# Allegro board PROIECT1_PACT_DIMA_DARIA_ELENA.brd
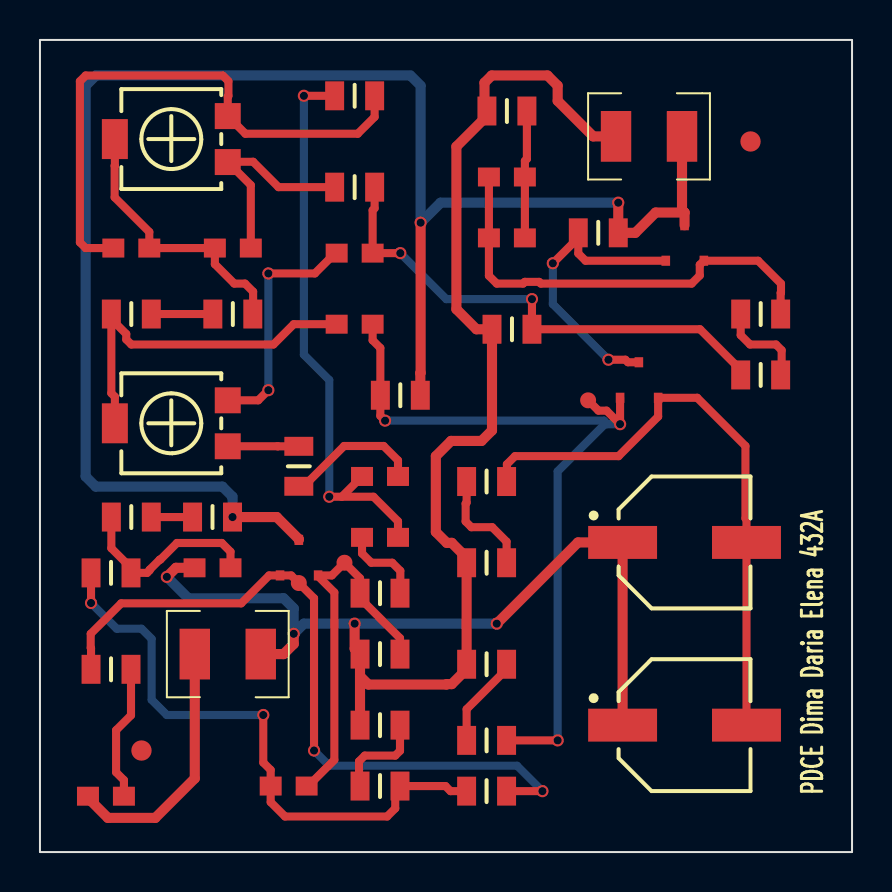
[diagram p0: board, top side]
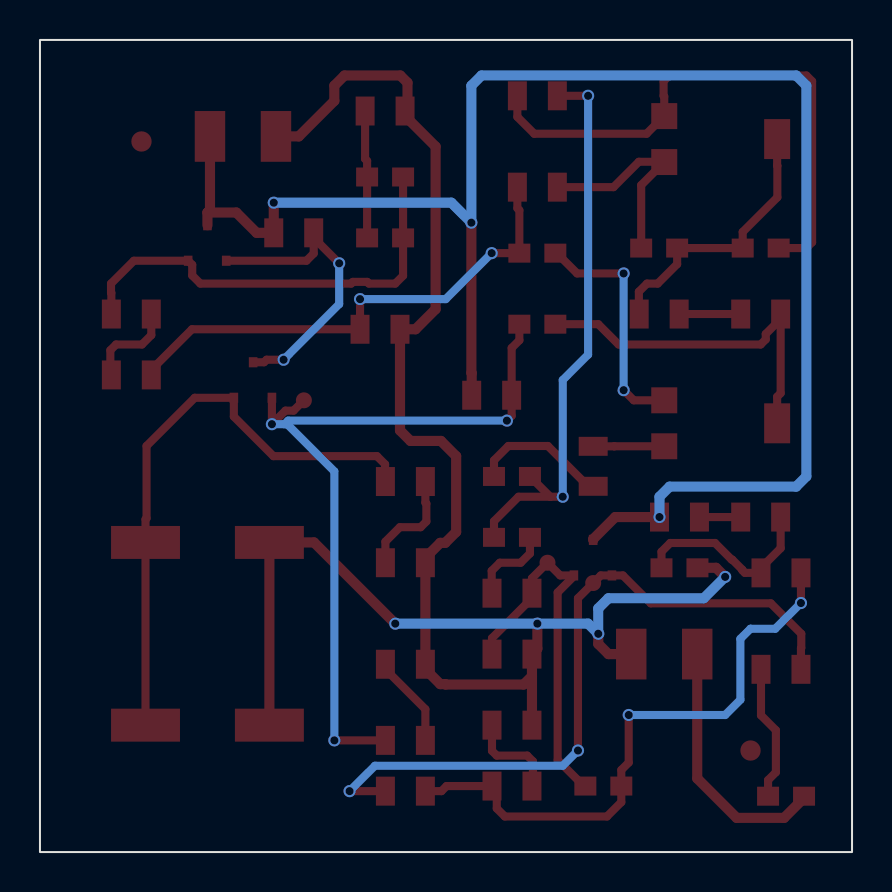
[diagram p1: board, bottom side, seen from below]

Outline 40.64 x 40.64 mm; copper layers: TOP, BOTTOM. Coordinates in mm from the lower left corner of the outline.
Outline path: rectangle 0,0 40.64,40.64

## Design rules (mm)
nets with their own width: min track width 0.406; nets N54032 N54046 N54178 N54188 N54204 N54218 N54262 N54326 N54384 N54482 N54490 N54582 N54596 N54646 N54690 N54848 N54862 N54964 N55108 N55114 N55120 N55228 N545221 N547421 N550761 N551881
nets with their own width: min track width 0.508; nets 0 N54052 N54576

## Placement (name value [footprint] x y rotation side)
C1  100n  [CAPC2008X126N_0805]  3.3 2.79 0 top
C2  4.7u  [CAPC2008X126N_0805]  8.64 14.22 0 top
C3  4.7u  [CAPC2008X126N_0805]  17.02 15.75 0 top
C4  4.7u  [CAPC2008X126N_0805]  12.45 3.3 0 top
C5  33n  [CAPC2008X126N_0805]  4.57 30.23 0 top
C6  33n  [CAPC2008X126N_0805]  9.65 30.23 0 top
C7  2.2n  [CAPC2008X126N_0805]  17.02 18.8 0 top
C8  2.2n  [CAPC2008X126N_0805]  15.75 29.97 0 top
C9  1u  [CAPC2008X126N_0805]  15.75 26.42 0 top
C10  10u  [CAPAE660X770N]  32.26 15.49 0 top
C11  10u  [CAPAE660X770N]  32.26 6.35 0 top
C12  4.7u  [CAPC2008X126N_0805]  23.37 33.78 0 top
C13  4.7u  [CAPC2008X126N_0805]  23.37 30.73 0 top
J1  CON2  [1210RF_WV_12D]  9.4 9.91 0 top
J2  CON2  [1210RF_WV_12D]  30.48 35.81 0 top
J3  CON1  [TP80]  15.24 14.48 0 top
J4  CON1  [TP80]  12.95 13.46 0 top
J5  CON1  [TP80]  27.43 22.61 0 top
Q1  BC846B  [SOT23]  12.95 14.73 90 top
Q2  BC846B  [SOT23]  29.97 23.62 90 top
Q3  BC846B  [SOT23]  32.26 30.48 90 top
R1  1k  [RES2012X50N_0805]  3.56 9.14 0 top
R2  100k  [RES2012X50N_0805]  3.56 13.97 0 top
R3  15k  [RES2012X50N_0805]  8.64 16.76 0 top
R4  15k  [RES2012X50N_0805]  4.57 16.76 0 top
R5  100k  [RES2012X50N_0805]  22.35 3.05 0 top
R6  22k  [RES2012X50N_0805]  17.02 3.3 0 top
R7  100k  [RES2012X50N_0805]  17.02 6.35 0 top
R8  1000k  [RES2012X50N_0805]  18.03 22.86 0 top
R9  8.2k  [RES2012X50N_0805]  15.75 37.85 0 top
R10  8.2k  [RES2012X50N_0805]  15.75 33.27 0 top
R11  100k  [TS53YL]  9.4 36.83 0 top
R12  10k  [RES2012X50N_0805]  9.65 26.92 0 top
R13  22k  [RES2012X50N_0805]  4.57 26.92 0 top
R14  100k  [TS53YL]  9.4 22.61 0 top
R15  2.2k  [RES2012X50N_0805]  12.95 19.3 90 top
R16  100k  [RES2012X50N_0805]  22.35 5.59 0 top
R17  100k  [RES2012X50N_0805]  22.35 9.4 0 top
R18  10k  [RES2012X50N_0805]  22.35 18.54 0 top
R19  10k  [RES2012X50N_0805]  22.35 14.48 0 top
R20  100k  [RES2012X50N_0805]  27.94 30.99 0 top
R21  4.7k  [RES2012X50N_0805]  36.07 26.92 0 top
R22  330  [RES2012X50N_0805]  17.02 12.95 0 top
R23  2.7k  [RES2012X50N_0805]  36.07 23.88 0 top
R24  5.6k  [RES2012X50N_0805]  17.02 9.91 0 top
R25  4.7k  [RES2012X50N_0805]  23.37 37.08 0 top
R26  1.8k  [RES2012X50N_0805]  23.62 26.16 0 top
REF  Value  [unnamed]  35.56 35.56 0 top
REF#2  Value  [unnamed]  5.08 5.08 0 top

## Library data of the parts
C1-C13 = C
J1 J2 = CON2
J3-J5 = CON1
Q1-Q3 = BC846B
R1-R10 R12 R13 R15-R26 = R
R11 R14 = POT

## Footprints (pads in the part's own frame, mm; a bottom-side part is the same pattern mirrored in y, then rotated)
1210RF_WV_12D
  rect 1.524x2.54 smd: 1(-1.651,0) 2(1.651,0)
CAPAE660X770N
  rect 3.45x1.65 smd: 1(-3.1,0) 2(3.1,0)
CAPC2008X126N_0805
  rect 1.1x0.95 smd: 1(-0.9,0) 2(0.9,0)
RES2012X50N_0805
  rect 0.95x1.45 smd: 1(-1,0) 2(1,0)
SOT23
  rect 0.508x0.432 smd: 1(-0.889,0.94) 2(-0.889,-0.965) 3(0.889,0)
TP80
  round 0.8 smd: 1(0,0)
TS53YL
  rect 1.3x1.3 smd: 1(0,0) 3(0,-2.3)
  rect 1.3x2 smd: 2(-5.65,-1.15)
unnamed
  round 1.016 smd: 1(0,0)

## Nets
0: C2.1 C10.1 C11.1 J1.2 J2.1 R7.1 R17.1 R19.1 R24.1 R25.1 R26.1
N54032: C2.2 R2.2 R4.1
N54046: R3.1 R4.2
N54052: J2.2 Q1.3 Q3.3 R3.2 R8.2 R20.2
N54178: C3.2 C7.1 R9.1
N54188: C5.1 R9.2 R11.1
N54204: C6.2 R10.1 R11.3
N54218: C8.2 R10.2 R23.1 R26.2
N54262: C5.2 C6.1 R11.2(T) R12.2
N54326: C4.1 R2.1 R5.1 R6.2
N54384: Q2.3 Q3.1 R20.1
N54482: C12.1 C13.1 Q3.2(E) R21.2
N54490: C12.2 C13.2 R25.2
N54576: C1.1 J1.1
N54582: J4.1 Q1.1 R1.1 R5.2
N54596: R12.1 R13.2
N54646: C9.2 J5.1 Q2.1 R8.1 R16.2
N54690: C4.2 J3.1 Q1.2(E) R22.1 R24.2
N54848: C3.1 R22.2
N54862: C9.1 R13.1 R14.2(T)
N54964: C10.2 C11.2 Q2.2(E) R18.2
N55108: C7.2 R15.1
N55114: R14.3 R15.2
N55120: C8.1 R14.1
N55228: R16.1 R17.2
N545221: C1.2 R1.2
N547421: R21.1 R23.2
N550761: R6.1 R7.2
N551881: R18.1 R19.2

Pads without a net: REF 1; REF#2 1

## Via types
v1: diameter 0.61, hole 0.406, TOP to BOTTOM, 22 vias

## Routing (per net, layer and track width the routed paths; a pad name or vN(x,y) marks a point on that pad's centre or on a via; arc(x,y) is an arc through that point)
0: length 93.2
  TOP w0.508: v1(22.86,11.43) 26.92,15.49 C10.1 C11.1 ; C2.1 6.8,14.22 v1(6.35,13.77) ; 16.02,8.8 R24.1 15.75,10.18 v1(15.75,11.43) ; 16.02,8.8 16.44,8.38 20.34,8.38 20.36,8.4 20.61,8.4 21.35,9.15 R17.1 R19.1 21.35,14.73 20.61,15.47 20.36,15.47 19.81,16.02 19.81,19.81 20.57,20.57 22.1,20.57 22.62,21.1 R26.1 21.84,26.16 20.84,27.17 20.84,35.31 22.37,36.83 R25.1 22.25,37.21 22.25,38.5 22.61,38.86 25.4,38.86 25.91,38.35 25.91,37.59 27.69,35.81 J2.1 ; 16.02,8.8 R7.1 ; J1.2 12.19,9.91 12.7,10.41 v1(12.7,10.92)
  BOTTOM w0.508: v1(22.86,11.43) v1(15.75,11.43) 13.21,11.43 v1(12.7,10.92) 12.7,12.19 12.19,12.7 7.42,12.7 v1(6.35,13.77)
N54032: length 9.8
  TOP w0.406: C2.2 9.54,15.03 9.1,15.47 6.86,15.47 6.02,14.63 5.99,14.63 5.49,14.13 5.49,14.1 5.36,13.97 R2.2 4.56,14.22 3.57,15.2 R4.1
N54046: length 2.1
  TOP w0.406: R4.2 R3.1
N54052: length 84.9
  TOP w0.508: v1(9.64,16.76) 11.85,16.76 12.95,15.66 Q1.3 ; 32.26,32 30.81,32 29.8,30.99 R20.2 v1(28.94,32.5) ; 32.26,32 Q3.3 ; 32.26,32 32.13,32.13 J2.2 ; R8.2 19.03,23.97 19.05,23.98 v1(19.05,31.5)
  BOTTOM w0.508: v1(28.94,32.5) 20.05,32.5 v1(19.05,31.5) 19.05,38.35 18.54,38.86 2.79,38.86 2.29,38.35 2.29,18.8 2.79,18.29 9.13,18.29 9.64,17.78 v1(9.64,16.76)
N54178: length 28.3
  TOP w0.406: 15.1,17.78 C7.1 ; 15.1,17.78 16.69,17.78 17.92,16.55 C3.2 ; 15.1,17.78 v1(14.48,17.78) ; R9.1 v1(13.21,37.85)
  BOTTOM w0.406: v1(14.48,17.78) 14.48,23.62 13.21,24.89 v1(13.21,37.85)
N54188: length 28.4
  TOP w0.406: R9.2 16.75,36.79 15.9,35.95 10.28,35.95 R11.1 9.4,37.81 9.43,37.84 9.43,38.57 9.14,38.86 2.29,38.86 2,38.57 2,30.51 2.29,30.23 C5.1
N54204: length 10.7
  TOP w0.406: R10.1 11.94,33.27 10.67,34.54 9.41,34.54 R11.3 10.55,33.38 C6.2
N54218: length 25.3
  TOP w0.406: R10.2 16.75,32.22 16.65,32.12 C8.2 v1(18.03,29.97) ; R23.1 35.07,24.13 33.03,26.16 R26.2 v1(24.62,27.67)
  BOTTOM w0.406: v1(18.03,29.97) 20.34,27.67 v1(24.62,27.67)
N54262: length 13.9
  TOP w0.406: R11.2 3.75,34.35 3.74,34.34 3.74,32.77 5.47,31.03 C5.2 C6.1 8.75,29.42 9.72,28.45 10.26,28.45 10.67,28.04 10.67,26.94 R12.2
N54326: length 30.1
  TOP w0.406: R2.1 v1(2.56,12.46) ; R5.1 20.55,3.05 20.29,3.3 R6.2 17.78,3.06 17.78,2.18 17.37,1.78 12.26,1.78 11.55,2.5 C4.1 11.55,4.11 11.18,4.48 v1(11.18,6.86)
  BOTTOM w0.406: v1(11.18,6.86) 6.35,6.86 5.59,7.62 5.59,10.67 5.08,11.18 3.84,11.18 v1(2.56,12.46)
N54384: length 14.9
  TOP w0.406: Q2.3 29.43,24.51 29.3,24.64 v1(28.45,24.64) ; R20.1 26.94,30.74 ; 26.94,30.74 26.94,29.96 27.3,29.59 Q3.1 ; 26.94,30.74 v1(25.67,29.46)
  BOTTOM w0.406: v1(25.67,29.46) 25.67,27.42 v1(28.45,24.64)
N54482: length 22.6
  TOP w0.406: R21.2 37.07,27.98 37.08,28 37.08,28.45 35.94,29.59 Q3.2 33.02,29.39 33.02,28.85 32.61,28.45 25.07,28.45 24.98,28.53 24.26,28.53 24.18,28.45 22.86,28.45 22.47,28.84 C13.1 C12.1
N54490: length 6.4
  TOP w0.406: C13.2 C12.2 24.27,34.59 24.37,34.69 R25.2
N54576: length 12.9
  TOP w0.508: J1.1 7.75,3.68 5.77,1.71 3.4,1.71 2.4,2.71 C1.1
N54582: length 36.3
  TOP w0.406: R1.1 2.56,10.2 2.54,10.22 2.54,10.92 4.06,12.45 10.07,12.45 11.47,13.84 Q1.1 12.57,13.84 J4.1 13.72,12.7 v1(13.72,5.08) ; R5.2 v1(25.15,3.05)
  BOTTOM w0.406: v1(25.15,3.05) 23.88,4.32 14.48,4.32 v1(13.72,5.08)
N54596: length 3.1
  TOP w0.406: R12.1 R13.2
N54646: length 39.8
  TOP w0.406: v1(25.91,5.59) R16.2 ; C9.2 16.65,25.61 17.03,25.22 R8.1 17.03,21.83 v1(17.27,21.59) ; J5.1 27.95,22.09 28.36,22.09 v1(29.03,21.41) Q2.1
  BOTTOM w0.406: v1(17.27,21.59) 28.22,21.59 28.4,21.41 ; 28.4,21.41 28.27,21.41 25.91,19.05 v1(25.91,5.59) ; 28.4,21.41 v1(29.03,21.41)
N54690: length 18.8
  TOP w0.406: R24.2 18.02,10.7 16.02,12.7 R22.1 16.02,13.7 J3.1 14.61,13.84 Q1.2 13.92,13.8 14.73,12.99 14.73,4.61 13.42,3.3 C4.2
N54848: length 4.2
  TOP w0.406: C3.1 16.12,14.94 16.58,14.48 17.63,14.48 18.03,14.07 18.03,12.97 R22.2
N54862: length 17.9
  TOP w0.406: 3.57,26.67 4.32,25.93 4.32,25.65 4.57,25.4 11.68,25.4 12.7,26.42 C9.1 ; 3.57,26.67 3.57,22.96 3.75,22.79 R14.2 ; 3.57,26.67 R13.1
N54964: length 29.7
  TOP w0.406: C11.2 C10.2 35.36,16.65 35.31,16.7 35.31,20.32 32.89,22.73 Q2.2 30.94,21.79 28.96,19.81 23.77,19.81 23.37,19.41 23.37,18.56 R18.2
N55108: length 6.9
  TOP w0.406: C7.2 17.92,19.6 17.2,20.32 15.22,20.32 13.2,18.3 R15.1
N55114: length 3.6
  TOP w0.406: R14.3 11.9,20.31 11.9,20.3 R15.2
N55120: length 11.9
  TOP w0.406: C8.1 14.77,29.97 13.76,28.96 v1(11.43,28.96) ; R14.1 10.92,22.61 v1(11.43,23.11)
  BOTTOM w0.406: v1(11.43,23.11) v1(11.43,28.96)
N55228: length 4.6
  TOP w0.406: R17.2 23.35,9.15 21.35,7.15 R16.1
N545221: length 6.8
  TOP w0.406: R1.2 4.56,6.84 3.81,6.1 3.81,3.99 4.2,3.6 C1.2
N547421: length 4.7
  TOP w0.406: R21.1 35.07,25.87 35.54,25.4 36.83,25.4 37.12,25.11 37.12,23.93 R23.2
N550761: length 4.8
  TOP w0.406: R6.1 15.97,3.35 15.97,4.54 16.26,4.83 17.78,4.83 18.02,5.06 R7.2
N551881: length 5.5
  TOP w0.406: R18.1 21.35,17.49 21.3,17.44 21.3,16.54 21.59,16.26 22.63,16.26 23.35,15.53 R19.2

## Text on the board
User.Comments: FIGURE | FINISHED_SIZE | 16.0 | DRILL CHART: TOP to BOTTOM | ALL UNITS ARE IN MILS | PLATED | QTY | 24
Ref Des/Silkscreen Top: PDCE Dima Daria Elena 432A
XSECTION_CHART: *  SURFACE | L1 TOP CONDUCTOR | *  DIELECTRIC | L2 BOTTOM CONDUCTOR | DESIGN CROSS SECTION CHART | ___________________________ | TOTAL THICKNESS 64 MIL | 1-2
